# Altium PCB PCB1.PcbDoc
Units mm, origin at the board's own origin, x right, y up, seen from the top; angles counter-clockwise.
Board outline 40.13 x 30.35 mm, 2 copper layers (Top Layer, Bottom Layer); 56 components, 38 nets, 198 pads, 12 vias.
Unrouted connection lines stored in the file: 130.
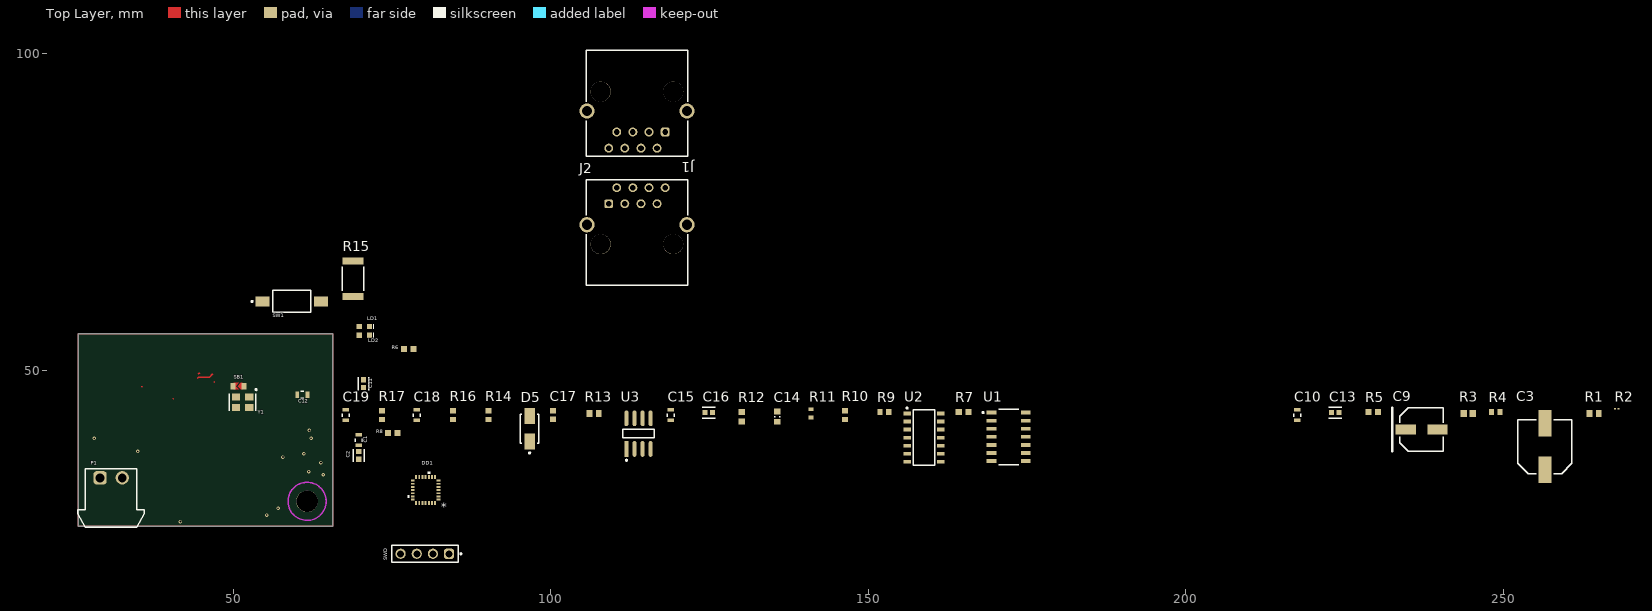
[diagram p0: Top Layer view]
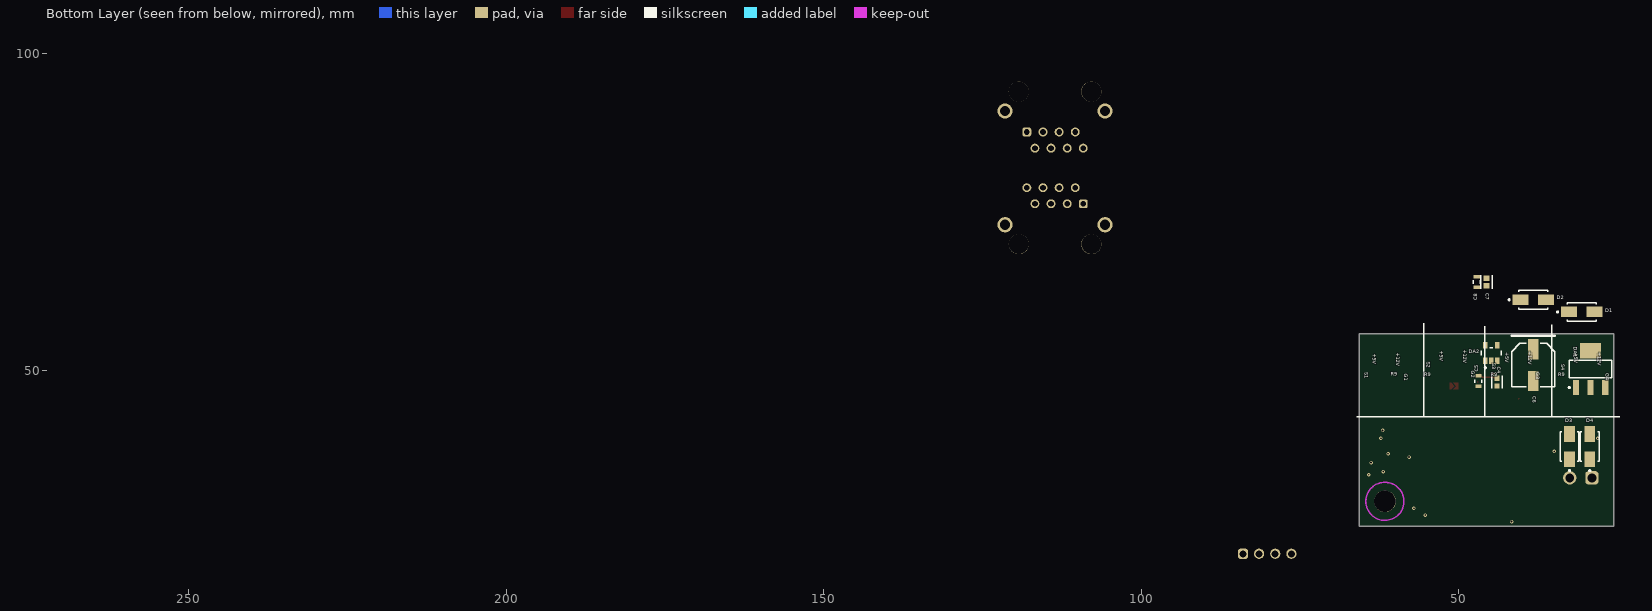
[diagram p1: Bottom Layer view, seen from below]

## Layer stack, top to bottom
Top Solder: solder mask 0.0102, Solder Resist, Dk 3.5
Top Layer: signal copper 0.0356
Dielectric 1: dielectric 0.32, FR-4, Dk 4.8
Bottom Layer: signal copper 0.0356
Bottom Solder: solder mask 0.0102, Solder Resist, Dk 3.5

## Board outline
25.527,25.527 65.659,25.527 65.659,55.88 25.527,55.88

## Design rules (kind name [scope] priority, off if disabled: settings)
Clearance [All] p1: gap=0.2 ignorepadtopadclearanceinfootprint=FALSE
PolygonConnect [All] p1: connectstyle=Direct reliefconductorwidth=0.254 reliefentries=4 polygonreliefangle="90 Angle" airgapwidth=0.254
RoutingVias [All] p1: holewidth=0.3 width=0.7 viastyle="Through Hole" minholewidth=0.3 minwidth=0.5 maxholewidth=3 maxwidth=5
SolderMaskExpansion [All] p1: expansion=0.102 istentingtop=FALSE
SupplyNets "Schematic Supply Nets_5" [InNet('-V')] p1: voltage=0.000
SupplyNets "Schematic Supply Nets_4" [InNet('DCC_K')] p2: voltage=0.000
SupplyNets "Schematic Supply Nets_3" [InNet('+12V')] p3: voltage=0.000
SupplyNets "Schematic Supply Nets_2" [InNet('+5V')] p4: voltage=0.000
SupplyNets "Schematic Supply Nets" [InNet('+3V3')] p5: voltage=0.000
Width [All] p1: maxlimit=1 minlimit=0.254 preferedwidth=0.3
30 further rules are at their usual default settings.

## Classes and differential pairs
component class top: C1 C2 C6 C7 C8 C9 C10 C11 C12 C13 C14 C15 C16 C17 C18 C19 D1 D3 D5 DA1 DD1 J1 J2 LD1 LD2 P1 R1 R2 R3 R4 R5 R6 R7 R8 R9 R10 R11 R12 R13 R14 R15 R16 R17 SB1 SW1 SWD U1 U2 U3 Y1

## Components (designator, comment, footprint, x,y, rotation, side; value= is the part's Value field where it differs from the comment)
C1 "CGA3E2X7R1H104K080AA" FP-CGA3E-0_3-0_1-IPC_C 69.723,39.116 r270 top
C2 "GRM188R60J106ME47D" FP-GRM188-0_1-e0_2_0_55-IPC_C 69.723,36.703 r270 top
C3 "EEE-FK1E221P" PNSC-EEE-FK1E221P_N 256.54,38.1 r90 top value=220uF
C4 "GRM188R60J106ME47D" FP-GRM188-0_1-e0_2_0_55-IPC_C 43.942,48.26 r90 bottom
C5 "CGA3E2X7R1H104K080AA" FP-CGA3E-0_3-0_1-IPC_C 46.863,48.387 r90 bottom
C6 "EEEFK1E101XP" PNSC-FK-V-D8_V 38.227,50.927 r270 bottom
C7 "GRM188R61A226ME15D" FP-GRM188-0_2-IPC_C 45.593,64.008 r270 bottom
C8 "CGA3E2X7R1H104K080AA" FP-CGA3E-0_3-0_1-IPC_C 47.117,64.008 r270 bottom
C9 "EEEFK1E101XP" PNSC-FK-V-D8_V 237.109,40.767 r0 top
C10 "CGA3E2X7R1H104K080AA" FP-CGA3E-0_3-0_1-IPC_C 217.551,43.053 r90 top
C11 "GRM188R60J106ME47D" FP-GRM188-0_1-e0_2_0_55-IPC_C 70.485,48.006 r90 top
C12 "CGA3E2X7R1H104K080AA" FP-CGA3E-0_3-0_1-IPC_C 60.833,46.228 r0 top
C13 "GRM188R60J106ME47D" FP-GRM188-0_1-e0_2_0_55-IPC_C 223.52,43.434 r0 top
C14 "CAP 10pF 25V 0603(1608)" CAPC0603(1608)100_N 135.636,42.799 r90 top value=10pF
C15 "CGA3E2X7R1H104K080AA" FP-CGA3E-0_3-0_1-IPC_C 118.872,43.053 r90 top
C16 "GRM188R60J106ME47D" FP-GRM188-0_1-e0_2_0_55-IPC_C 124.841,43.434 r0 top
C17 "GRM188R71H102KA01D" CAPC1608X90X35NL10T15 100.33,43.053 r90 top value=1n
C18 "CGA3E2X7R1H104K080AA" FP-CGA3E-0_3-0_1-IPC_C 78.867,43.053 r90 top
C19 "CGA3E2X7R1H104K080AA" FP-CGA3E-0_3-0_1-IPC_C 67.691,43.053 r90 top
D1 "B340A-13-F" FP-SMA-MFG 30.607,59.309 r180 bottom
D2 "B340A-13-F" FP-SMA-MFG 38.227,61.214 r180 bottom
D3 "B340A-13-F" FP-SMA-MFG 32.512,38.1 r90 bottom
D4 "B340A-13-F" FP-SMA-MFG 29.337,38.1 r90 bottom
D5 "B340A-13-F" FP-SMA-MFG 96.647,40.894 r90 top
DA1 "LD1117S50CTR" SOT-223_N 29.21,50.292 r90 bottom
DA2 "NCP114ASN330T1G" FP-483-MFG 44.831,52.832 r90 bottom
DD1 "STM32G031G8Ux" UFQFPN-28 80.264,31.242 r180 top value=Value
J1 "615008140421" 615008140421 113.538,92.154 r180 top
J2 "615008140421" 615008140421 113.538,71.803 r0 top
LD1 "150060VS75000" WL-SMCW_0603_150060xx75000 70.612,57.023 r180 top
LD2 "150060VS75000" WL-SMCW_0603_150060xx75000 70.612,55.626 r180 top
P1 "15EDGRC-3.5-02" 691305140002 30.734,29.972 r0 top
R1 "ERJ3EKF8203V" RESC1608X55X30ML15T15 264.287,43.307 r0 top value=820
R2 "ERJ1GNF2703C" RESC0603X26X15LL03T05 267.843,44.069 r0 top value=270k
R3 "ERA3AEB333V" RESC1608X55X30ML20T20 244.475,43.307 r0 top value=33k
R4 "ERJ-3EKF1001V" RESC1608X55X30NL15T15#1 248.793,43.561 r0 top value=1k
R5 "ERJ-3EKF2200V" RESC1608X55X30NL15T15#2 229.489,43.561 r0 top value=220
R6 "ERJ-3EKF2200V" RESC1608X55X30NL15T15#2 77.597,53.467 r0 top value=220
R7 "ERJ3EKF1002V" RESC1609X55X30NL15T15 164.973,43.561 r0 top value=10k
R8 "ERJ3EKF1002V" RESC1609X55X30NL15T15 75.057,40.259 r0 top value=10k
R9 "ERJ-3EKF1001V" RESC1608X55X30NL15T15#1 152.527,43.561 r0 top value=1k
R10 "ERJ-3EKF1001V" RESC1608X55X30NL15T15#1 146.304,43.053 r90 top value=1k
R11 "RC0603FR-071ML" RESC1608X55X25LL10T15 140.97,43.307 r90 top value=1M
R12 "ERJ3EKF1002V" RESC1609X55X30NL15T15 130.048,42.799 r90 top value=10k
R13 "ERJ-3EKF1003V" RESC1608X55X30ML15T15 106.807,43.307 r0 top value=100k
R14 "ERJ-3EKF1001V" RESC1608X55X30NL15T15#1 90.17,43.053 r90 top value=1k
R15 "MCR100JZHJ1R8" FP-MCR100-IPC_C 68.834,64.516 r90 top
R16 "ERJ-3EKF1003V" RESC1608X55X30NL15T15#1 84.582,43.053 r90 top value=100
R17 "ERJ-3EKF1003V" RESC1608X55X30NL15T15#1 73.406,43.053 r90 top value=100
SB1 "" JP_SMD 50.8,47.625 r0 top
SW1 "FSMSMTR" TECO-FSMSMTR_V 59.182,60.96 r0 top
SWD "61300411121" 61300411121 80.137,21.209 r180 top
U1 "CD4001BM" FP-D0014A-MFG 172.085,39.624 r0 top
U2 "LM339DR2G" ONSC-SOIC-14-751A-03_V 158.75,39.497 r0 top
U3 "THVD1500D" FP-D0008B-IPC_A 113.792,40.132 r90 top
Y1 "ASE-8.000MHZ-LC-T" FP-ASE-MFG 51.435,45.085 r180 top

## Footprints (in the part's own frame and the unit in brackets; to place one, negate y for a bottom-side part, rotate by r counter-clockwise, add the part's x,y. Pads: shape width x height; smd on the part's side, far side on the other; paste and mask are expansions set on the pad)
61300411121 [mm] "Pin Header, pitch 2.54 mm, THT, Vertical, single row, 4p"
  rrect50% 1.6x1.6 hole 1.1: 1(-3.81,0)
  round 1.6 hole 1.1: 2(-1.27,0) 3(1.27,0) 4(3.81,0)
  silkscreen extent -5.8,-1.35 5.23,1.35, body extent -5.08,-1.27 5.08,1.27, height 8.57
615008140421 [mm] "Modular Jack Vertical Shielded 8P8C Rear Post"
  rrect50% 1.4x1.4 hole 0.9: 1(-4.445,4.524)
  round 1.4 hole 0.9: 2(-3.175,7.064) 3(-1.905,4.524) 4(-0.635,7.064) 5(0.635,4.524) 6(1.905,7.064) 7(3.175,4.524) 8(4.445,7.064)
  round 3.17 hole 3.17 unplated: M1(-5.715,-1.826) M2(5.715,-1.826)
  round 2.4 hole 1.6: Shell(-7.875,1.224) Shell(7.875,1.224)
  silkscreen extent -8,-8.32 8,8.32, body extent -8,-8.32 8,8.33, height 16.65
691305140002 [mm] "Horizontal PCB Header with Plastic Latch, pitch 3.5mm, 02p"
  rrect50% 2.1x2.1 hole 1.4: 1(-1.75,3.2)
  round 2.1 hole 1.4: 2(1.75,3.2)
  silkscreen extent -5.25,-4.6 5.25,4.6, body extent -5.25,-4.6 5.25,4.6, height 7.25
CAPC0603(1608)100_N [mm] "Chip Capacitor, Body 1.6x0.8mm, Height 1.0mm, IPC Medium Density"
  rect 0.9x1 smd: 1(-0.8,0) 2(0.8,0)
  silkscreen extent -0.05,-0.4 0.05,0.4, body extent -0.87,-0.48 0.88,0.47, height 1
CAPC1608X90X35NL10T15 [mm] "Chip Capacitor, 2-Leads, Body 1.60x0.80mm, IPC Medium Density"
  rect 0.85x0.95 smd: 1(-0.675,0) 2(0.675,0)
  body extent -0.85,-0.45 0.85,0.45, height 0.9
FP-483-MFG [mm]
  rect 1x0.7 smd paste+0 mask+0: 1(-1.2,0.95) 2(-1.2,0) 3(-1.2,-0.95) 4(1.2,-0.95) 5(1.2,0.95)
  silkscreen extent -2.45,-1.58 0.82,1.58, body extent -1.22,-1.5 1.22,1.5, height 1.1
FP-ASE-MFG [mm]
  rect 1.3x1.1 smd paste+0 mask+0: 1(-1.05,-0.825) 2(1.05,-0.825) 3(1.05,0.825) 4(-1.05,0.825)
  silkscreen extent -2.25,-2.09 2.07,1.35, body extent -1.8,-1.48 1.8,1.48, height 0.25
FP-CGA3E-0_3-0_1-IPC_C [mm]
  rect 0.556x1.006 smd paste+0 mask+0: 1(-0.825,0) 2(0.825,0)
  silkscreen extent -0.25,-0.55 0.25,0.55, body extent -1.2,-0.65 1.2,0.65, height 0.25
FP-D0008B-IPC_A [mm]
  rect 2.469x0.622 smd paste+0 mask+0: 1(-2.414,1.905)
  rrect100% 2.469x0.622 smd paste+0 mask+0: 2(-2.414,0.635) 3(-2.414,-0.635) 4(-2.414,-1.905) 5(2.414,-1.905) 6(2.414,-0.635) 7(2.414,0.635) 8(2.414,1.905)
  silkscreen extent -4.32,-2.45 0.68,2.45
FP-D0014A-MFG [mm]
  rect 1.55x0.6 smd paste-1000 mask+0: 1(-2.7,3.81) 2(-2.7,2.54) 3(-2.7,1.27) 4(-2.7,0) 5(-2.7,-1.27) 6(-2.7,-2.54) 7(-2.7,-3.81) 8(2.7,-3.81) 9(2.7,-2.54) 10(2.7,-1.27) 11(2.7,0) 12(2.7,1.27) 13(2.7,2.54) 14(2.7,3.81)
  silkscreen extent -4.15,-4.38 1.55,4.38, body extent -3.57,-4.62 3.57,4.62, height 0.25
FP-GRM188-0_1-e0_2_0_55-IPC_C [mm]
  rect 0.808x0.812 smd paste+0 mask+0: 1(-0.602,0) 2(0.602,0)
  silkscreen extent -1.01,-0.85 1.01,0.85, body extent -1.11,-0.55 1.11,0.55, height 0.25
FP-GRM188-0_2-IPC_C [mm]
  rect 0.905x0.906 smd paste+0 mask+0: 1(-0.601,0) 2(0.601,0)
  silkscreen extent -1.05,-0.9 1.05,0.9, body extent -0.8,-0.4 0.8,0.4, height 1
FP-MCR100-IPC_C [mil]
  rect 45.5x128.28 smd paste+0 mask+0: 1(-110.29,0) 2(110.29,0)
  silkscreen extent -76,-66 76,66, body extent -137,-70 137,70, height 10
FP-SMA-MFG [mm]
  rect 2.5x1.7 smd paste+0 mask+0: 1(-2,0) 2(2,0)
  silkscreen extent -3.93,-1.46 2.3,1.46, body extent -2.6,-1.3 2.6,1.3, height 2.4
JP_SMD [mil]
  rect 32x40 smd: 1(33.75,0) 2(-33.75,0)
  Top Layer region: -28.25,0 -18,0 2,20 -28.25,20
  Top Layer region: -28.25,0 -18,0 2,-20 -28.25,-20
  Top Layer region: 24,20 14,20 -6,0 14,-20 24,-20
ONSC-SOIC-14-751A-03_V [mm] "SOIC, 14-Leads, Body 8.75x4mm, Pitch 1.27mm"
  rect 1.18x0.58 smd: 1(-2.66,3.81) 2(-2.66,2.54) 3(-2.66,1.27) 4(-2.66,0) 5(-2.66,-1.27) 6(-2.66,-2.54) 7(-2.66,-3.81) 8(2.66,-3.81) 9(2.66,-2.54) 10(2.66,-1.27) 11(2.66,0) 12(2.66,1.27) 13(2.66,2.54) 14(2.66,3.81)
  silkscreen extent -2.78,-4.38 1.67,4.77, body extent -2,-4.38 2,4.38, height 1.75
PNSC-EEE-FK1E221P_N [mm] "CAPAE, 2-Leads, Body 8.5x8.5mm, IPC Medium Density"
  rect 4.2x2.1 smd: 1(-3.675,0) 2(3.675,0)
  silkscreen extent -4.25,-4.25 4.25,4.25, body extent -5,-4.25 5,4.25, height 10.5
PNSC-FK-V-D8_V [mm] "CAPAE, 2-Leads, Body 6.80x6.80mm"
  rect 3.2x1.6 smd: 1(-2.5,0) 2(2.5,0)
  silkscreen extent -4.6,-3.4 3.4,3.4, body extent -3.9,-3.4 3.9,3.4, height 8
RESC0603X26X15LL03T05 [mm] "Chip Resistor, 2-Leads, Body 0.60x0.30mm, IPC High Density"
  rect 0.35x0.25 smd: 1(-0.275,0) 2(0.275,0)
  body extent -0.32,-0.16 0.31,0.17, height 0.26
RESC1608X55X25LL10T15 [mm] "Chip Resistor, 2-Leads, Body 1.70x0.90mm, IPC High Density"
  rect 0.6x0.8 smd: 1(-0.65,0) 2(0.65,0)
  body extent -0.85,-0.45 0.85,0.45, height 0.55
RESC1608X55X30ML15T15 [mm] "Chip Resistor, 2-Leads, Body 1.60x0.80mm, IPC Low Density"
  rect 0.9x1.05 smd: 1(-0.725,0) 2(0.725,0)
  body extent -0.87,-0.48 0.87,0.48, height 0.55
RESC1608X55X30ML20T20 [mm] "Chip Resistor, 2-Leads, Body 1.60x0.80mm, IPC Low Density"
  rect 1x1.1 smd: 1(-0.7,0) 2(0.7,0)
  body extent -0.9,-0.5 0.9,0.5, height 0.55
RESC1608X55X30NL15T15#1 [mm] "Chip Resistor, 2-Leads, Body 1.60x0.80mm, IPC Medium Density"
  rect 0.8x0.95 smd: 1(-0.675,0) 2(0.675,0)
  body extent -0.87,-0.48 0.87,0.48, height 0.55
RESC1608X55X30NL15T15#2 [mm] "Chip Resistor, 2-Leads, Body 1.75x0.95mm, IPC Medium Density"
  rect 0.95x0.95 smd: 1(-0.75,0) 2(0.75,0)
  body extent -0.87,-0.48 0.87,0.48, height 0.55
RESC1609X55X30NL15T15 [mm] "Chip Resistor, 2-Leads, Body 1.75x0.95mm, IPC Medium Density"
  rect 0.95x0.95 smd: 1(-0.75,0) 2(0.75,0)
  body extent -0.87,-0.48 0.87,0.48, height 0.55
SOT-223_N [mm] "SOT223, 4-Leads, Body 6.5x3.5mm, Pitch 2.3mm, Lead Span 7mm, IPC Medium Density"
  rect 2.4x1 smd: 1(-2.9,2.3) 2(-2.9,0) 3(-2.9,-2.3)
  rect 2.4x3.3 smd: 4(2.9,0)
  silkscreen extent -3.02,-3.35 1.4,3.48, body extent -1.85,-3.35 1.85,3.35, height 1.8
TECO-FSMSMTR_V [mm] "SMD, 2-Leads, Body 6x3.5mm, Pitch 9.19mm"
  rect 2.2x1.6 smd: 1(-4.595,0)
  rect 2.18x1.6 smd: 2(4.595,0)
  silkscreen extent -6.37,-1.75 3,1.75, body extent -4.98,-1.75 4.98,1.75, height 4.4
UFQFPN-28 [mil] "STM32 package, UFQFPN28, 4 x 4mm"
  rect 23.62x11.81 smd paste-5.91 mask+0: 1(-80.5,59.1) 2(-80.5,39.4) 3(-80.5,19.7) 4(-80.5,0) 5(-80.5,-19.7) 6(-80.5,-39.4) 7(-80.5,-59.1) 15(80.5,-59.1) 16(80.5,-39.4) 17(80.5,-19.7) 18(80.5,0) 19(80.5,19.7) 20(80.5,39.4) 21(80.5,59.1)
  rect 11.81x23.62 smd paste-5.91 mask+0: 8(-59.1,-80.5) 9(-39.4,-80.5) 10(-19.7,-80.5) 11(0,-80.5) 12(19.7,-80.5) 13(39.4,-80.5) 14(59.1,-80.5) 22(59.1,80.5) 23(39.4,80.5) 24(19.7,80.5) 25(0,80.5) 26(-19.7,80.5) 27(-39.4,80.5) 28(-59.1,80.5)
  silkscreen extent -27,-112 112,47, body extent -69,-69 69,69, height 22
WL-SMCW_0603_150060xx75000 [mm] "SMD Mono-color Chip LED, body 1.60 x 0.80 mm"
  rect 0.8x0.8 smd: 1(-0.8,0) 2(0.8,0)
  silkscreen extent -1.55,-0.4 -1.4,0.4, body extent -0.8,-0.4 0.8,0.4, height 0.7

## Part data
C1 C5 C8 C10 C12 C15 C18 C19: library part CMP-2000-07546-2, "Cap Ceramic 100nF 50V X7R 10% Pad SMD 0603 +125°C Automotive T/R", Capacitance=100nF, Case Code (Imperial)=0603, Case Code (Metric)=1608, Dielectric=X7R, Max Operating Temperature=125°C, Min Operating Temperature=-55°C, Package Quantity=1, Ratings=AEC-Q200, Tolerance=10%, Voltage=50V, Case/Package=0603, Composition=Ceramic, Depth=0.8mm, Height=0.8mm, Lead Free="Lead Free", Length=1.6mm, Mount="Surface Mount", Packaging="Tape and Reel", Radiation Hardening=No, REACH SVHC="No SVHC", Termination=SMD/SMT, Thickness=0.035inch, Voltage Rating=50V, Voltage Rating (DC)=50V, Weight=7.1E-05oz, Width=0.8mm
C2 C4 C11 C13 C16: library part CMP-2006-02792-2, "Chip Multilayer Ceramic Capacitors for General Purpose, 0603, 10uF, X5R, 15%, 20%, 6.3V", Capacitance=10uF, Case Code (Imperial)=0603, Case Code (Metric)=1608, Dielectric=X5R, Max Operating Temperature=85°C, Min Operating Temperature=-55°C, Package Quantity=4000, Tolerance=20%, Voltage=6.3V, Case/Package=0603, Depth=0.8mm, Height=0.8mm, Lead Free="Lead Free", Length=1.6mm, Material=Ceramic, Mount="Surface Mount", Packaging="Tape and Reel", Radiation Hardening=No, REACH SVHC="No SVHC", Termination=SMD/SMT, Thickness=0.035inch, Voltage Rating=6.3V, Voltage Rating (DC)=6.3V, Width=0.031inch
C3: library part CMP-1665-00017-3, "Aluminum Electrolytic Capacitor, 220 uF, +/- 20%, 25 V, -55 to 105 degC, 2-Pin CAPAE, RoHS, Tape and Reel", Manufacturer=Panasonic, Max Operating Temperature="105 degC", Min Operating Temperature="-55 degC", Package Quantity=500, Voltage Rating="25 V", ComponentLink1Description="Manufacturer URL", ComponentLink1URL=http://www.panasonic.com/, ComponentLink2Description=Datasheet, ComponentLink2URL=http://industrial.panasonic.com/cdbs/www-data/pdf/RDE0000/ABA0000C1181.pdf, DatasheetVersion=03/2016, Height="10.2 mm", Lead Pitch="3.1 mm", Length="10.2 mm", Mount="Surface Mount", Mounting Technology="Surface Mount", PackageDescription="2-Pin Electrolytic Aluminum Capacitor, Body 8.3 x 8.3 mm", PackageReference=EEE-FK1E221P, Packaging="Tape and Reel", Pins=2, REACH SVHC="No SVHC", RoHSCompliant=true
C6 C9: library part CMP-2000-06206-1, "Aluminum Electrolytic Capacitor, 100 uF, +/- 20%, 25 V, 2-Pin SMD (Size Code D8), -55 to 105 degC, RoHS, Tape and Reel", Capacitance=100µF, Case Size/Dimension=Ø6.3x7.7mm, Lifetime@Temperature=2000Hrs@105°C, Manufacturer=Panasonic, Operating Temp Range=-55to+105°C, Operating Temp-Max=105°C, Package Description="2-Pin Electrolytic Aluminum Capacitor, Body 6.6 x 6.6 mm", Package Reference=FK-V-D8, Rated Voltage=25V, Ripple Current=280mA, Datasheet URL=http://industrial.panasonic.com/cdbs/www-data/pdf/RDE0000/ABA0000C1181.pdf, Datasheet Version=03/2016, Impedance=0.34O, Manufacturer URL=http://www.panasonic.com/, Mounting Technology=SurfaceMount, Package URL=http://industrial.panasonic.com/cdbs/www-data/pdf/RDE0000/DME0000COL48.pdf, Series=FK, Type=Can
C7: library part CMP-2000-06337-3, "Chip Multilayer Ceramic Capacitors for General Purpose, 0603, 22uF, X5R, 15%, 20%, 10V", Capacitance=22uF, Case Code (Imperial)=0603, Case Code (Metric)=1608, Dielectric=X5R, Max Operating Temperature=85°C, Min Operating Temperature=-55°C, Package Quantity=4000, Tolerance=20%, Voltage Rating=10V, Case/Package=0603, Depth=0.8mm, Height=0.8mm, Lead Free="Lead Free", Length=1.6mm, Material=Ceramic, Mount="Surface Mount", Packaging="Tape and Reel", REACH SVHC="No SVHC", Termination=SMD/SMT, Thickness=0.039inch, Voltage Rating (DC)=10V, Weight=0.000222oz, Width=0.8mm
C14: library part CMP-1035-00549-1, "CAP 10pF 25V ±1% 0603 (1608 Metric) Thickness 1mm SMD", Case-EIA=0603, Case-Metric=1608, Rated Voltage="25 V", Tolerance=Â±1%, Max Thickness="1 mm", Technology=SMT
C17: library part CMP-2006-02891-1, Manufacturer=Murata, Part Number=GRM188R71H102KA01D
D1 D2 D3 D4 D5: library part CMP-1667-00003-3, "DIODE SCHOTTKY 40V 3A SMA", Average Rectified Current=3A, Capacitance=250pF, Case/Package=SMA, Forward Voltage=500mV, Max Forward Surge Current (Ifsm)=80A, Max Operating Temperature=125°C, Max Repetitive Reverse Voltage (Vrrm)=40V, Max Reverse Current=500uA, Min Operating Temperature=-55°C, Package Quantity=5000, Contact Plating=Tin, Current=3A, Current Rating=3A, Element Configuration=Single, Forward Current=3A, Height=2.3mm, Lead Free="Lead Free", Length=4.6mm, Max Reverse Voltage (DC)=40V, Mount="Surface Mount", Number of Pins=2, Output Current=3A, Packaging="Tape and Reel", Peak Non-Repetitive Surge Current=80A, Polarity=Standard, Radiation Hardening=No, REACH SVHC="No SVHC", RoHS Compliant=Yes, Series=-, Termination=SMD/SMT, Voltage=40V, Voltage Rating (DC)=40V, Weight=0.002258oz, Width=2.92mm
DA1: library part CMP-0244-00311-1, "Fixed Low Drop Positive Voltage Regulator, 5V, 4-Pin SOT-223, Tape and Reel", ComponentLink1Description="Manufacturer URL", ComponentLink1URL=http://www.st.com, ComponentLink2Description=Datasheet, ComponentLink2URL=http://www.st.com/internet/com/TECHNICAL_RESOURCES/TECHNICAL_LITERATURE/DATASHEET/CD00000544.pdf, DatasheetVersion=1/11/2011, PackageDescription="4-Pin SOT-223 Package, 6.5 x 3.5 mm Body, 2.3 mm Pitch, 7 mm Lead Span", PackageReference=SOT-223, PackageVersion=2010
DA2: library part CMP-07128-000001-1, "IC REG LINEAR 3.3V 300MA 5TSOP", Dropout Voltage=150mV, Manufacturer="ON Semiconductor", Max Junction Temp=+150°C, Max Supply Voltage=5.5V, Min Supply Voltage=1.7V, Nominal Supply Current=50uA, Output Current=300mA, Output Voltage=3.3V, Package=483, Temperature="to +150°C", Accuracy Percentage=1%, Automotive=No, Category=IC, ComponentLink2Description=Datasheet, ComponentLink2URL=https://www.onsemi.com/pub/Collateral/NCP114-D.PDF, Device Class L1="Integrated Circuits (ICs)", Device Class L2="Power Management ICs", Device Class L3="Voltage Regulators - Linear", Digikey Description="IC REG LINEAR 3.3V 300MA 5TSOP", Footprint Url=https://www.onsemi.com/pub/Collateral/483.PDF, Height=1.1mm, Lead Free=Yes, Manufacturer Part Number=NCP114ASN330T1G, Number of Outputs=1, Octopart=https://octopart.com/ncp114asn330t1g-on+semiconductor-74628742, Output Type=Fixed, RoHS=TRUE, Standoff Height=0.01mm, Temperature Range High=+150°C
DD1: "The STM32G031x4/x6/x8 mainstream microcontrollers are based on high-performance Arm® Cortex®-M0+ 32-bit RISC core operating at up to 64 MHz frequency.   / 64 Kbytes of Flash program memory and 8 Kbytes of SRAM. With 28pin UFQFPN 4x4x0.55 package", Manufacturer_Part_Number=stm32g0_ufqfpn28_t1, Built_By=EMA_Jessica, Copyright="Copyright (C) 2016 Accelerated Designs. All rights reserved", RefDes=RefDes, Type=DEV, Vendor=STMicroelectronics
J1 J2: library part CMP-1502-01733-2, Color=Black, Contact Resistance=20mΩ, Current Rating=1.5A, Flammability Rating="UL94 V-0", Insulation Resistance=500MΩ, Max Operating Temperature=85°C, Min Operating Temperature=-40°C, Operating Supply Voltage=120V, Connector Type="RJ45, Socket", Contact Material=Copper, Contact Plating=Gold, Depth=16.4mm, Direction="User Selectable", Gender=Female, Height=16.65mm, Housing Material=PBT, Insulation Material=PBT, Lead Free="Lead Free", Length=16.65mm, Mount="Through Hole", NexarPartId=18818182, Number of Contacts=8, Number of Ports=1, Number of Positions=8, Number of Rows=1, Orientation=Vertical, REACH SVHC=Unknown, RoHS=Compliant, Shielding=Shielded, Termination="Through Hole", Voltage Rating=120V, Voltage Rating (AC)=120V, Width=19.5mm
LD1 LD2: library part CMP-1426-00006-7, "WURTH ELEKTRONIK - 150060VS75000 - LED, Green, SMD, 0603, 30 mA, 2 V, 570 nm", Case Code (Imperial)=0603, Case Code (Metric)=1608, Color=Green, Forward Current=100mA, Forward Voltage=2V, Max Junction Temperature (Tj)=95°C, Max Operating Temperature=85°C, Max Reverse Voltage (DC)=5V, Min Operating Temperature=-40°C, Power Dissipation=72mW, Test Current=20mA, Case/Package=0603, Dominant Wavelength=570nm, Height=700µm, Length=1.6mm, Lens Style="Clear, Rectangular", Luminous Intensity=40mcd, Mount="Surface Mount", Number of Pins=2, Packaging="Tape and Reel", Peak Wavelength=572nm, REACH SVHC=Unknown, Reverse Voltage=5V, RoHS=Compliant, Viewing Angle=140°, Wavelength=570nm, Width=800µm
P1: library part CMP-1502-01775-2, Gender=Male, Lead Pitch=3.5mm, NexarPartId=78871375, Number of Pins=2, Packaging=Box, RoHS=Non-Compliant
R1: library part CMP-2000-00657-1, Manufacturer=Panasonic, Part Number=ERJ3EKF8203V
R2: library part CMP-2004-03497-1, Manufacturer=Panasonic, Part Number=ERJ1GNF2703C
R3: library part CMP-2000-00041-1, Manufacturer=Panasonic, Part Number=ERA3AEB333V
R4 R9 R10 R14: library part CMP-2000-00180-1, Manufacturer=Panasonic, Part Number=ERJ-3EKF1001V
R5 R6: library part CMP-2000-00335-2, "Chip Resistor, 220 Ohm, +/- 1%, 0.1 W, -55 to 155 degC, 0603 (1608 Metric), RoHS, Tape and Reel", Case Code (Imperial)=0603, Case Code (Metric)=1608, Max Operating Temperature="155 degC", Min Operating Temperature="-55 degC", Package Quantity=5000, Power Rating="100 mW", Resistance="22 Ohm", Tolerance=1%, Voltage Rating="50 V", Case\Package=0603, ComponentLink1Description="Manufacturer URL", ComponentLink1URL=http://www.panasonic.com/, ComponentLink2Description=Datasheet, ComponentLink2URL=http://industrial.panasonic.com/cdbs/www-data/pdf/RDA0000/AOA0000C86.pdf, DatasheetVersion=Apr-15, Height="0.45 mm", Length="1.6 mm", Mount="Surface Mount", PackageDescription="2-Pin Surface Mount Device, Body 1.6 x 0.85 mm", PackageReference=0603, Packaging="Tape and Reel", Pins=2, REACH SVHC="No SVHC", RoHSCompliant=true, Voltage Rating (DC)="50 V", Width="0.8 mm"
R7 R8 R12: library part CMP-1012-00623-3, "Chip Resistor, 10 KOhm, +/- 1%, 0.1 W, -55 to 155 degC, 0603 (1608 Metric), RoHS, Tape and Reel", Case Code (Imperial)=0603, Case Code (Metric)=1608, Manufacturer=Panasonic, Max Operating Temperature=155degC, Max Power Dissipation=100mW, Min Operating Temperature=-55degC, Package Description="2-Pin Surface Mount Device, Body 1.6 x 0.85 mm", Package Quantity=1, Package Reference=603, Resistance=10KOhm, Temperature Coefficient=100ppm\/degreesC, Tolerance=1%, Voltage Rating=75V, Case\/Package=0603, Composition=ThickFilm, Contact Plating=Tin, Datasheet URL=https://industrial.panasonic.com/cdbs/www-data/pdf/RDA0000/AOA0000C304.pdf, Datasheet Version=02/2017, Depth=0.8mm, Height=0.45mm, Lead Free=LeadFree, Length=1.6mm, Manufacturer URL=http://www.panasonic.com/, Military Standard=Not, Mount=SurfaceMount, Mounting Technology=SurfaceMount, Number of Pins=2, Number of Terminations=2, Packaging=TapeandReel, Power Rating=100mW, Radiation Hardening=No, REACH SVHC=NoSVHC, RoHSCompliant=true, Termination=SMD/SMT, Voltage Rating (DC)=75V, Width=0.031inch
R11: library part CMP-1659-00056-1, "Chip Resistor, 1 MOhm, +/- 1%, 100 mW, -55 to 155 degC, 0603 (1608 Metric), RoHS, Tape and Reel", Capacitance="1 mF", Case\Package=Radial, Max Operating Temperature="85 degC", Min Operating Temperature="-40 degC", Package Quantity=200, Tolerance=20%, Voltage Rating="25 V", ComponentLink1Description="Manufacturer URL", ComponentLink1URL=http://www.yageo.com/, ComponentLink2Description=Datasheet, ComponentLink2URL=http://www.yageo.com/documents/recent/PYu-RC_Group_51_RoHS_L_04.pdf, DatasheetVersion="Rev. 4, 02/2016", Diameter="10 mm", Height="20 mm", Lead Pitch="5 mm", Length="20 mm", Mount="Through Hole", PackageDescription="2-Pin Surface Mount Device, Body 1.6 x 0.8 mm", PackageReference=0603, Packaging=Bulk, Radiation Hardening=No, REACH SVHC="No SVHC", RoHSCompliant=true, Voltage Rating (DC)="25 V", Width="0 inch"
R13 R16 R17: library part CMP-2000-00182-1, Manufacturer=Panasonic, Part Number=ERJ-3EKF1003V
R15: library part CMP-08839-000552-1, "Thick Film Chip Resistor, 2512, 1.8Ω, 5%, +850/+150ppm/°C, 1W, 200V", Case Code (Imperial)=2512, Case Code (Metric)=6432, Max Operating Temperature=125°C, Max Power Dissipation=1W, Min Operating Temperature=-55°C, Resistance=1.8R, Temperature Coefficient=850ppm/°C, Tolerance=5%, Voltage Rating (DC)=200V, Case/Package=2512, Features="Automotive AEC-Q200", Height=0.55mm, Length=6.3mm, Number of Terminations=2, Packaging="Tape and Reel", Power Rating=1W, RoHS Compliant=Yes, Series=MCR, Width=3.2mm
SB1: library part "Circuit Breaker", "Circuit Breaker", Published=24-Mar-1999, Publisher="Altium Limited", Revision="July-2002: Re-released for DXP Platform.", Solder=NO
SW1: library part CMP-2000-07501-1, "FSMSM Push Button Switch, 50 mA, -35 to 85 degC, 2-Pin SMD, RoHS, Tape and Reel", Case\/Package=SMD/SMT, Contact Current Rating=50mA, Contact Resistance=100mOhm, Manufacturer="TE Connectivity", Max Operating Temperature=85degC, Max Voltage Rating (DC)=12V, Min Operating Temperature=-35degC, Operating Force=180gf, Package Description="2-Pin Surface Mount Device, Body 6 x 3.5 mm, Pitch 9.19 mm", Package Quantity=1800, Voltage Rating (DC)=24V, Actuator Length=1.07mm, Actuator Material=Polyamide, Contact Material=Brass, Contact Plating=Silver, Current Rating=50mA, Datasheet URL=http://www.te.com/commerce/DocumentDelivery/DDEController?Action=showdoc&DocId=Customer+Drawing%7F1437566-3%7FC2%7Fpdf%7FEnglish%7FENG_CD_1437566-3_C2_1437566_3_1_c.dwg.pdf%7F1437566-4, Datasheet Version="Rev. C2, 08/2014", Electrical Life=20000Cycles, ELV=Compliant, Illumination Type=Illuminated, Lead Free=LeadFree, Manufacturer URL=http://www.te.com/, Mechanical Life=20000Cycles, Mount=SurfaceMount, Mounting Technology=SurfaceMount, Orientation=Straight, Package Reference=FSMSMTR, Packaging=TapeandReel, REACH SVHC=Unknown, RoHSCompliant=true, Switch Travel=0.25mm, Termination=GullWing, Throw Configuration=SPST
SWD: library part CMP-1502-01064-3, Color=Black, Contact Resistance=20mΩ, Current Rating=3A, Max Operating Temperature=105°C, Min Operating Temperature=-40°C, Operating Supply Voltage=250V, Connector Type="Male Pin", Contact Material=Copper, Contact Mating Length=5.9944mm, Contact Plating=Gold, Gender=Male, Height=8.89mm, Lead Free="Lead Free", Lead Pitch=2.54mm, Mount="Through Hole", NexarPartId=32855522, Number of Contacts=4, Number of Pins=4, Number of Positions=4, Number of Rows=1, Orientation=Vertical, Packaging=Bulk, Pitch=2.54mm, REACH SVHC=Unknown, RoHS=Compliant, Termination=Solder, Voltage Rating=250V
U1: library part CMP-0806-00066-4, "IC GATE NOR 4CH 2-INP 14SOIC", Case/Package=SOIC, High Level Output Current=-4.2mA, Low Level Output Current=4.2mA, Max Operating Temperature=125°C, Max Supply Voltage=18V, Min Operating Temperature=-55°C, Min Supply Voltage=3V, Output Current=6.8mA, Package Quantity=50, Quiescent Current=5uA, Contact Plating=Gold, Height=1.58mm, Lead Free="Lead Free", Length=8.65mm, Logic Function=NOR, Mount="Surface Mount", Number of Bits=4, Number of Circuits=4, Number of Elements=4, Number of Gates=4, Number of Input Lines=2, Number of Inputs=2, Number of Output Lines=1, Number of Outputs=1, Number of Pins=14, Packaging=Rail/Tube, Propagation Delay=90ns, Radiation Hardening=No, REACH SVHC="No SVHC", Schmitt Trigger Input=No, Turn-On Delay Time=90ns, Weight=0.004564oz, Width=3.91mm
U2: library part CMP-1305-00036-1, "Single Supply Quad Comparators, 0 to 70 degC, 14-Pin SOIC, Pb-Free, Tape and Reel", Manufacturer="On Semiconductor", ComponentLink1Description="Manufacturer URL", ComponentLink1URL=http://www.onsemi.com/, ComponentLink2Description=Datasheet, ComponentLink2URL=http://www.onsemi.com/pub_link/Collateral/LM339-D.PDF, ComponentLink3Description="Package Specification", ComponentLink3URL=http://www.onsemi.com/pub_link/Collateral/751A-03.PDF, DatasheetVersion="Rev. 20", IO Typ (mA)=16, Mounting Technology="Surface Mount", PackageDescription="14-Pin Small Outline Integrated Circuit, Body 8.65 x 3.9 mm, Pitch 1.27 mm", PackageReference=SOIC-14-751A-03, PackageVersion="Rev. K, 05/2011", Packing="Tape and Reel", PartNumber=LM339DR2G, RoHS=TRUE
U3: library part CMP-04875-000034-1, "IC TRANSCEIVER HALF 1/1 8SOIC", Case/Package=VSSOP, Input Bias Current=8pA, Input Offset Voltage (Vos)=200uV, Max Operating Temperature=125°C, Min Operating Temperature=-40°C, Operating Supply Current=1.6mA, Output Current per Channel=75mA, Data Rate=300Kbps, Gain Bandwidth Product=10MHz, Mount="Surface Mount", Number of Circuits=1, Packaging="Tape and Reel", Receiver Hysteresis=50mV, RoHS Compliant=Yes, Simplex/Duplex="Half Duplex", Slew Rate=10V/µs
Y1: library part CMP-27762-006944-1, "XTAL Oscillator 8MHz ±50ppm CMOS 3.3V 4-SMD 3.2mm x 2.5mm", Case/Package=SMD/SMT, Frequency=8MHz, Frequency Stability=50ppm, Load Capacitance=15pF, Max Operating Temperature=85°C, Max Supply Current=7mA, Max Supply Voltage=3.465V, Min Operating Temperature=-40°C, Min Supply Voltage=3.135V, Operating Frequency="8 MHz", Operating Supply Voltage=3.3V, Package Quantity=1000, Depth=2.5mm, Height=0.047inch, Lead Free="Lead Free", Length=3.2mm, Mount="Surface Mount", Number of Pins=4, Packaging="Tape and Reel", Radiation Hardening=No, REACH SVHC="No SVHC", Series=ASE, Termination=SMD/SMT, Width=0.098inch

## Free pads (board coordinates)
  round 3.4 hole 3.4: 1(61.595,29.464)

## Via types
v1: diameter 0.55, hole 0.3, Top Layer to Bottom Layer, tented both sides, 12 vias

## Nets (pads, with @x,y where several pads share a name; then routed paths per layer and width w, separated by ;. In a path a pad name is that pad's centre, name@x,y a point inside that pad or via, vN(x,y) a via of type N, cw(c..) or ccw(c..) an arc to the next point about the centre after c; other vN are vias at no path point)
+3V3: C1.1 C2.1 C18.1 DA2.5 DD1.3 Y1.4
+5V: C6.1 C7.1 C8.1 C10.1 C11.1 C12.1 C13.1 C15.1 C16.1 DA1.2 DA1.4 DA2.1 DA2.3 R2.2 R7.1 R8.1 R12.1 SWD.1 U1.14 U2.3 U3.8
+12V: C3.1 C4.1 C5.1 D1.1 DA1.3
-V: D3.1 R3.1 R6.2
DCC_J: D1.2 D2.1 J1.1 J1.2 J2.1 J2.2 P1.1 R13.2
DCC_K: C1.2 C2.2 C3.2 C4.2 C5.2 C6.2 C7.2 C8.2 C9.1 C10.2 C11.2 C12.2 C13.2 C14.2 C15.2 C16.2 C17.1 C18.2 C19.2 D3.2 D4.2 D5.1 DA1.1 DA2.2 DD1.4 J1.7 J1.8 J2.7 J2.8 LD1.1 LD2.1 R1.2 R4.1 R11.2 R14.2 R15.1 SB1.2 SW1.2 SWD.3 U1.7 U2.12 U3.5 Y1.2
  other v1: 41.656,26.289 55.245,27.305 57.025,28.385 64.135,33.655 61.849,34.163 63.754,35.56 61.087,36.957 34.925,37.338 28.067,39.37 62.23,39.403 61.946,40.64
DCC_K_out: D4.1 D5.2 P1.2 R15.2 U2.5 U2.6
N18mV: R1.1 R3.2 U2.7 U2.8
NetC9_2: C9.2 R5.1 R6.1
NetC14_1: C14.1 J1.Shell J2.Shell R11.1
NetC17_2: C17.2 R12.2 U1.12 U1.13 U2.13 U2.14
NetC19_1: C19.1 DD1.5 SW1.1
NetD2_2: D2.2 R5.2
NetDD1_1: DD1.1 Y1.3
NetDD1_18: DD1.18 R16.1
NetDD1_19: DD1.19 R17.1
NetJ1_3: J1.3 J2.3
NetJ1_6: J1.6 J2.6
NetLD1_2: LD1.2 R16.2
NetLD2_2: LD2.2 R17.2
NetR7_2: R7.2 U1.2 U2.1
NetR8_2: R8.2 U1.1 U2.2
NetR9_2: R9.2 U1.10
NetR10_2: R10.2 U1.9 U1.11
NetR13_1: R13.1 R14.1 U2.9 U2.10
NetSB1_1: SB1.1 Y1.1
NetU1_3: U1.3 U1.5 U1.6
NetU1_4: U1.4 U1.8
P18mV: R2.1 R4.2 U2.4 U2.11
RailCom_Int: DD1.28 R10.1
RailCom_RX: DD1.27 R9.1
RS_A: J1.4 J2.4 U3.6
RS_B: J1.5 J2.5 U3.7
RS_DE/R\E\: DD1.7 U3.2 U3.3
RS_RX: DD1.9 U3.1
RS_TX: DD1.8 U3.4
SWD_CLK: DD1.21 SWD.2
SWD_IO: DD1.20 SWD.4
pads on no net: DA2.4 DD1.2 DD1.6 DD1.10 DD1.11 DD1.12 DD1.13 DD1.14 DD1.15 DD1.16 DD1.17 DD1.22 DD1.23 DD1.24 DD1.25 DD1.26 J1.M1 J1.M2 J2.M1 J2.M2
copper on no net: | length 2.9
  Top Layer w0.254: 35.56,47.498 35.603,47.541 ; 40.513,45.593 40.534,45.614 ; 44.366,48.884 44.504,49.022 46.217,49.022 46.658,49.463 46.704,49.463 ; 44.501,49.534 44.624,49.657 44.704,49.657 ; 46.99,48.26 47.003,48.247
  other v1: 57.785,36.449

## Polygon pours and split planes (outlines as drawn)
DCC_K on Bottom Layer "GND_Bot" (solid, remove dead copper, shelved, pour order 6): 25.527,55.88 65.659,55.88 65.659,25.527 25.527,25.527
DCC_K on Top Layer "GND_Top" (solid, remove dead copper, shelved, pour order 4): 25.527,55.88 65.659,55.88 65.659,25.527 25.527,25.527

## Keep-outs
Keep-Out Layer:
  circle w0.254: c61.595,29.464 r3

## Silkscreen, mask and mechanical layers (free items; w line width, h text height)
Bottom Overlay:
  lines w0.2: 24.638,42.799 66.04,42.799 ; 35.306,42.799 35.306,57.277 ; 45.847,42.799 45.847,57.023 ; 55.499,42.799 55.499,57.531
  text "+12V" at 49.53,53.34 h1 r90
  text "+5V" at 53.203,53.213 h1 r90
  text "+12V" at 39.243,53.086 h1 r90
  text "+12V" at 28.321,52.959 h1 r90
  text "+5V" at 42.916,52.959 h1 r90
  text "+5V" at 31.994,52.832 h1 r90
  text "+12V" at 60.071,52.832 h1 r90
  text "+5V" at 63.744,52.705 h1 r90
  text "S2" at 55.235,51.435 h1 r90
  text "S3" at 44.947,51.181 h1 r90
  text "S4" at 34.026,51.054 h1 r90
  text "G2" at 48.25,50.038 h1 r90
  text "G3" at 37.962,49.784 h1 r90
  text "S1" at 65.014,49.784 h1 r90
  text "G4" at 27.041,49.657 h1 r90
  text "G1" at 58.791,49.53 h1 r90
  text "R9" at 60.706,49.032 h1
  text "R9" at 34.29,48.905 h1
  text "R9" at 44.958,48.905 h1
  text "R9" at 55.372,48.905 h1
Board Shape:
  the board outline again, w0.5

## Dimensions
65.659,25.527 to 65.659,55.88 on Top Component Center
25.527,25.527 to 65.659,25.527 on Top Component Center

## Text inside footprints (layer, text, board x,y; h text height)
DD1: Top 3D Body "*" at 82.072,30.126 h1.27 r180; Top Overlay "*" at 83.561,29.745 h1.27 r180; Mechanical 7 "0.122in/3.099mm" at 82.645,37.755 h0.64 r180; Mechanical 7 "0.122in/3.099mm" at 90.904,31.559 h0.64 r180; Mechanical 7 "0.161in/4.089mm" at 73.116,31.559 h0.64 r180; Mechanical 7 "0.161in/4.089mm" at 82.645,24.094 h0.64 r180; Mechanical 7 "0.02in/0.5mm" at 75.021,30.309 h0.64 r180; Mechanical 7 "Alt 2 Padstyle: OX90Y60D30P" at 88.837,45.883 h1.27 r180; Mechanical 7 "Alt 1 Padstyle: OX60Y90D30P" at 88.837,44.359 h1.27 r180; Mechanical 7 "Default Padstyle: RX11p81Y23p62D0T" at 91.059,39.787 h1.27 r180